# Altium PCB Ra-chan.PcbDoc
Units mm, origin at the board's own origin, x right, y up, seen from the top; angles counter-clockwise.
Board outline 28.07 x 80.52 mm, 2 copper layers (Top Layer, Bottom Layer); 4 components, 3 nets, 8 pads, 0 vias.
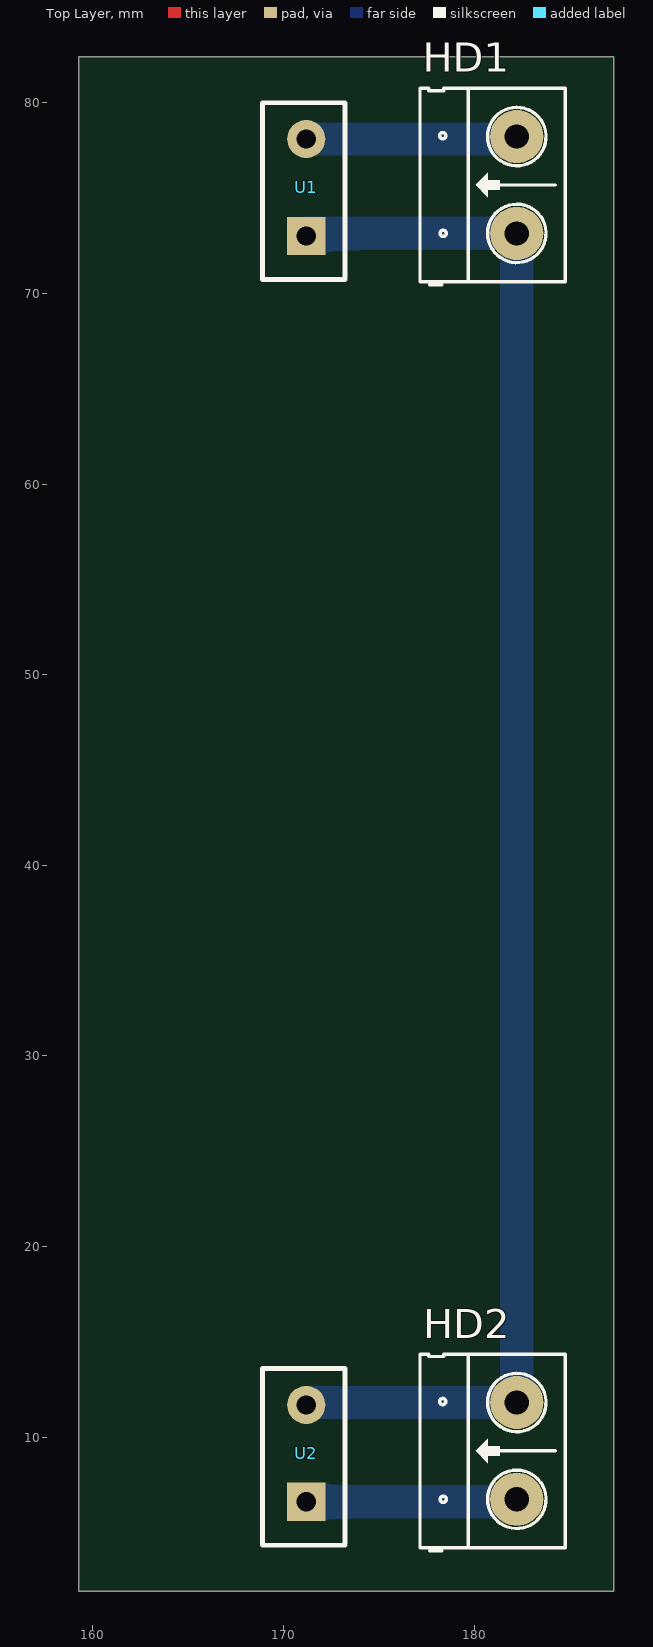
[diagram p0: Top Layer view]
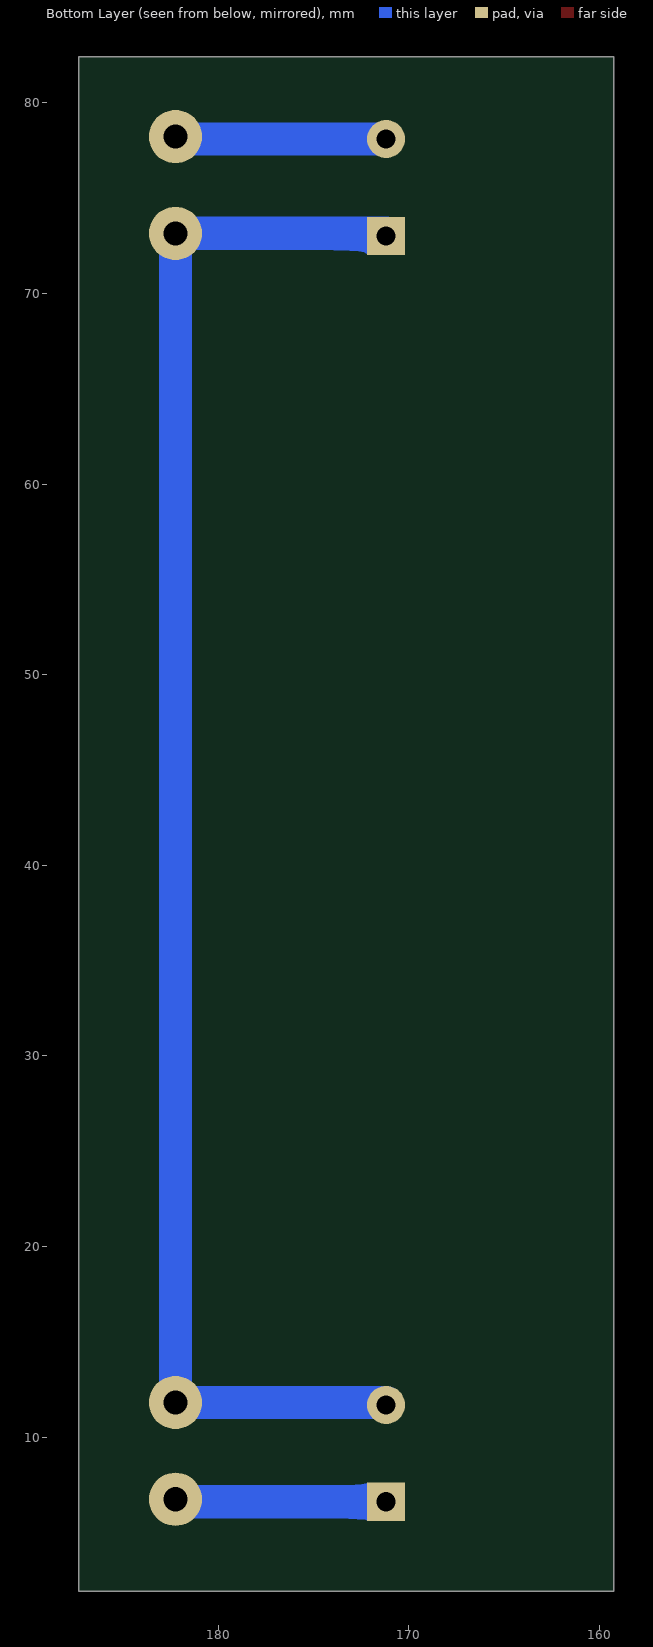
[diagram p1: Bottom Layer view, seen from below]
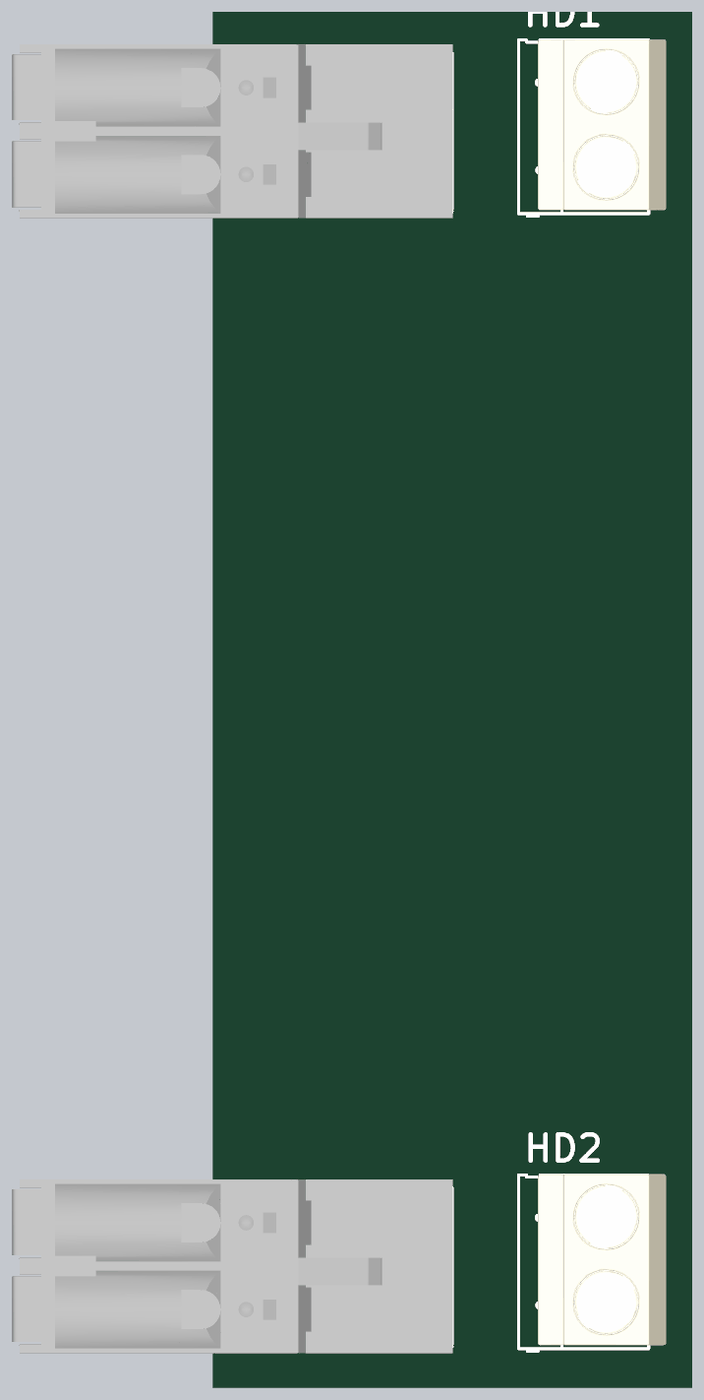
[diagram p2: 3D render of the assembled board from above, using the file's embedded part models]

## Layer stack, top to bottom
Top Solder: solder mask 0.0102, Solder Resist, Dk 3.5
Top Layer: signal copper 0.0356
Dielectric 1: dielectric 0.32, FR-4, Dk 4.8
Bottom Layer: signal copper 0.0356
Bottom Solder: solder mask 0.0102, Solder Resist, Dk 3.5

## Board outline
159.258,82.423 159.258,1.905 187.325,1.905 187.325,82.423

## Design rules (kind name [scope] priority, off if disabled: settings)
Clearance [All] p1: gap=0.5 ignorepadtopadclearanceinfootprint=FALSE
PolygonConnect [All] p1: connectstyle=Relief reliefconductorwidth=0.254 reliefentries=4 polygonreliefangle="90 Angle" airgapwidth=0.254
RoutingVias [All] p1: holewidth=0.711 width=1.27 viastyle="Through Hole" minholewidth=0.711 minwidth=1.27 maxholewidth=0.711 maxwidth=1.27
SolderMaskExpansion [All] p1: expansion=0.102
Width [All] p1: maxlimit=1.75 minlimit=1.25 preferedwidth=1.75
30 further rules are at their usual default settings.

## Components (designator, comment, footprint, x,y, rotation, side; value= is the part's Value field where it differs from the comment)
HD1 "Header 2" HED2 182.245,73.152 r90 top
HD2 "Header 2" HED2 182.245,6.731 r90 top
U1 "Terminal" "Terminal 5.08" 171.196,73.025 r180 top
U2 "Terminal" "Terminal 5.08" 171.196,6.604 r180 top

## Footprints (in the part's own frame and the unit in brackets; to place one, negate y for a bottom-side part, rotate by r counter-clockwise, add the part's x,y. Pads: shape width x height; smd on the part's side, far side on the other; paste and mask are expansions set on the pad)
HED2 [mil] "Header 2, 2 pin, hight 300mil, Pin to Pin 200, Colour Green"
  round 110 hole 50: 1(0,0) 2(200,0)
  silkscreen extent -106,-100 300,200, body extent -92,-140 302,155, height 394
"Terminal 5.08" [mm]
  rect 2x2 hole 1: 1(0,0)
  round 2 hole 1: 2(0,-5.08)
  silkscreen extent -2.03,-6.98 2.29,2.29, body extent -2.1,-7.49 23.7,2.67, height 14.2

## Part data
HD1 HD2: library part Hed2, "Header 2 (Green)"
U1 U2: library part TERMINAL5.08

## Nets (pads, with @x,y where several pads share a name; then routed paths per layer and width w, separated by ;. In a path a pad name is that pad's centre, name@x,y a point inside that pad or via, vN(x,y) a via of type N, cw(c..) or ccw(c..) an arc to the next point about the centre after c; other vN are vias at no path point)
NetHD1_1: HD1.1 HD2.2 U1.1 U2.2 | length 83.7
  Bottom Layer w1.75: U2.2 171.196,11.811 HD2.2 HD1.1 171.196,73.152 U1.1
NetHD1_2: HD1.2 U1.2 | length 11.2
  Bottom Layer w1.75: U1.2 182.245,78.105 HD1.2
NetHD2_1: HD2.1 U2.1 | length 11.2
  Bottom Layer w1.75: U2.1 182.245,6.604 HD2.1